# Altium PCB 01-超声波传感器模块-电路板图.PcbDoc
Units mm, origin at the board's own origin, x right, y up, seen from the top; angles counter-clockwise.
Board outline 42.63 x 19.24 mm, 4 copper layers (Top Layer, Mid-Layer 7, Mid-Layer 14, Bottom Layer); 10 components, 11 nets, 44 pads, 9 vias.
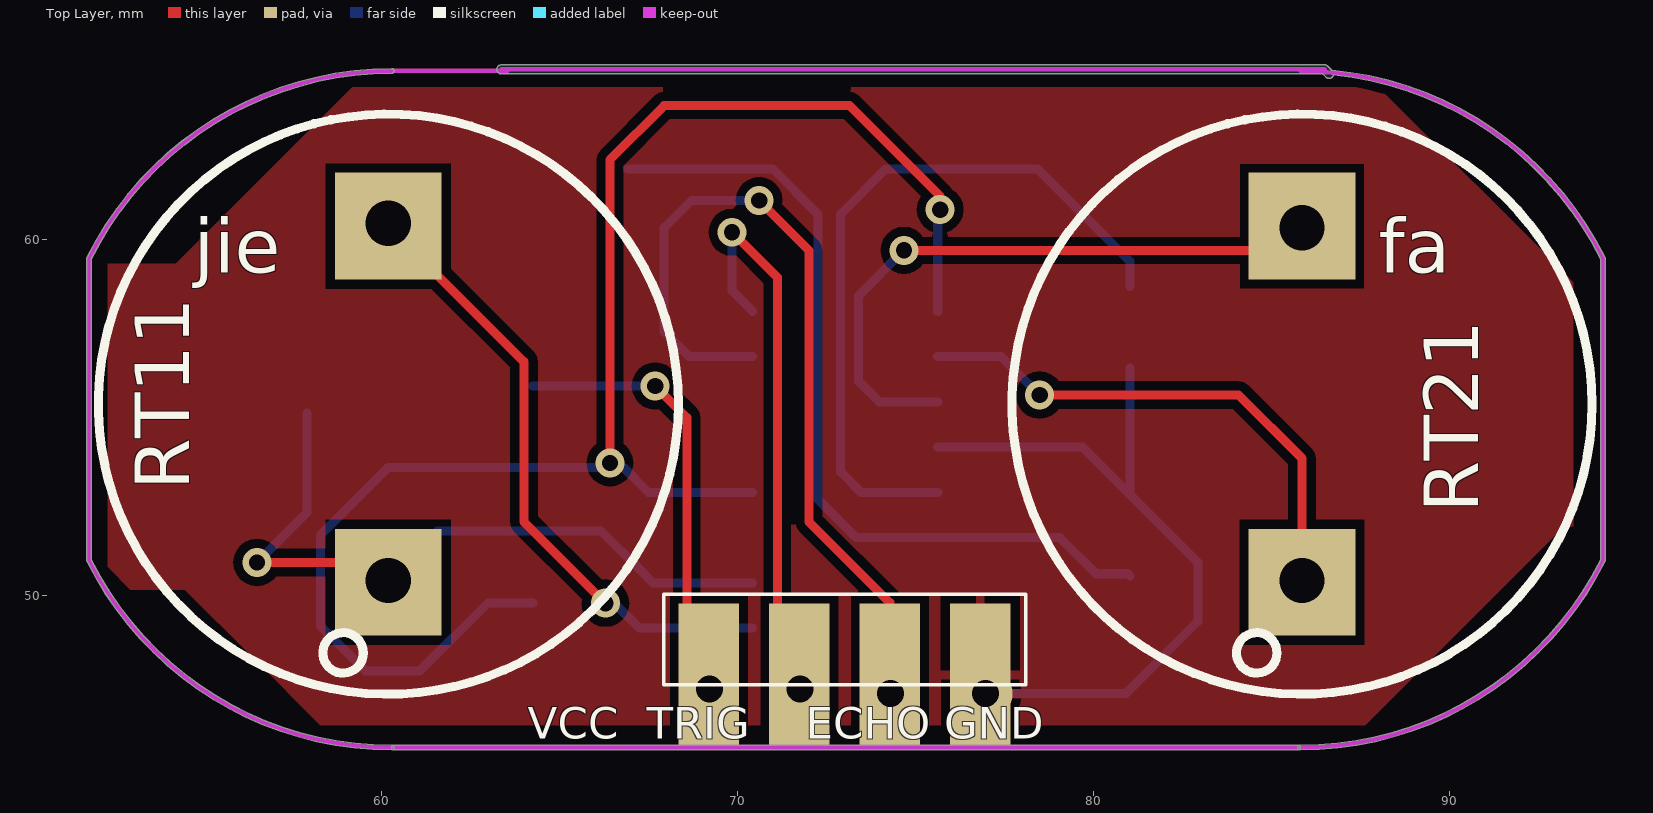
[diagram p0: Top Layer view]
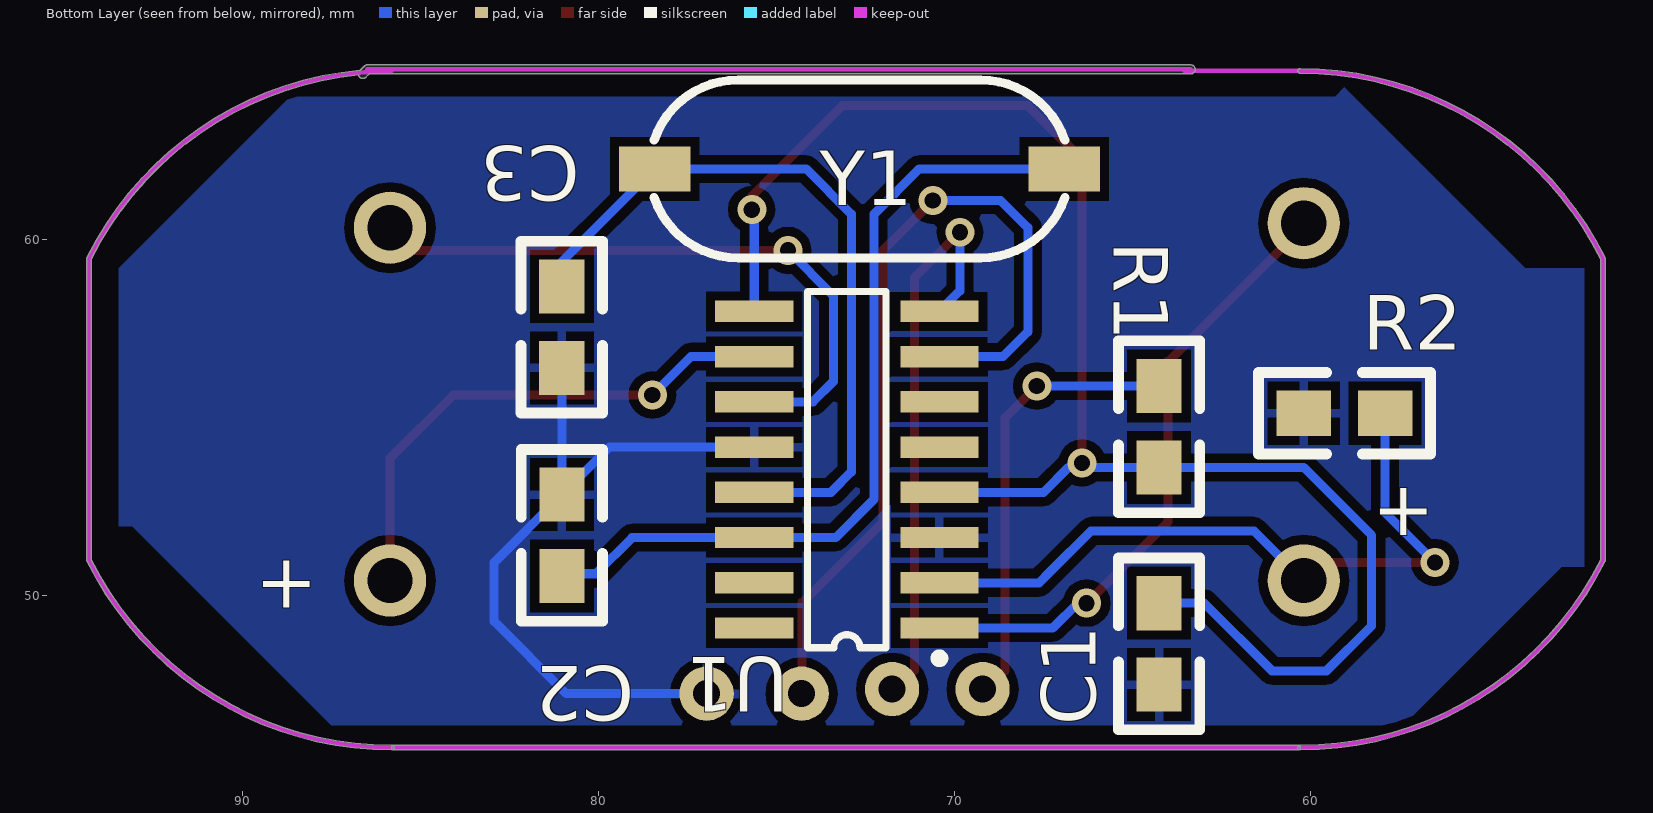
[diagram p1: Bottom Layer view, seen from below]
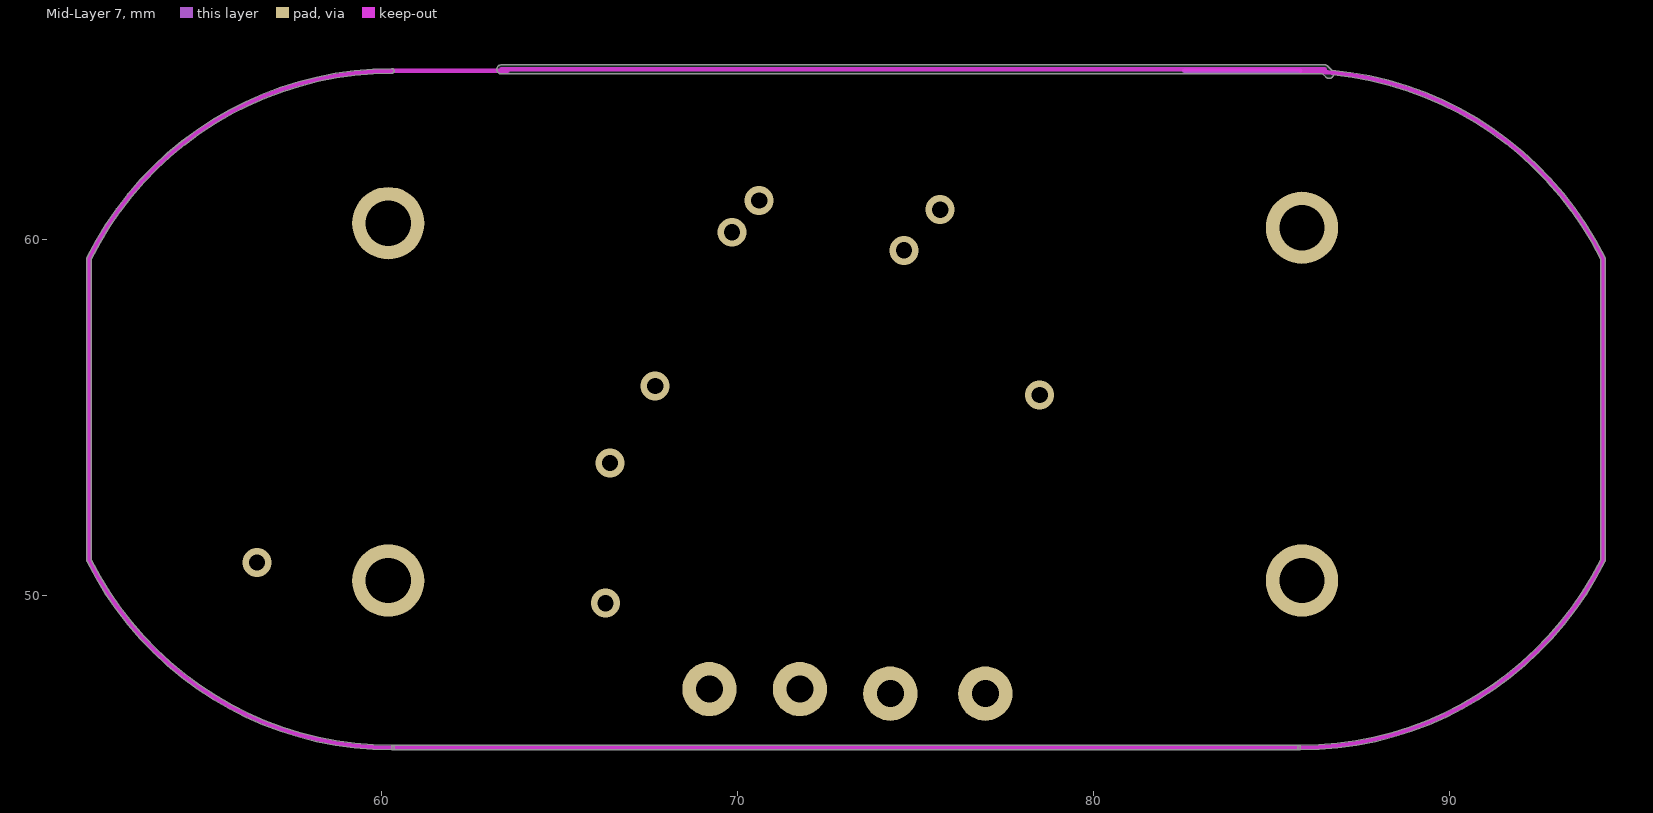
[diagram p2: Mid-Layer 7]

## Layer stack, top to bottom
Top Layer: signal copper 0.0356
Dielectric: dielectric 0.32, FR-4, Dk 4.8
Mid-Layer 7: signal copper 0.0356
Dielectric: dielectric 0.32, FR-4, Dk 4.8
Mid-Layer 14: signal copper 0.0356
Dielectric: dielectric 0.32, FR-4, Dk 4.8
Bottom Layer: signal copper 0.0356

## Board outline
51.742,50.954 cw(c51.799,50.983) 51.741,50.958 cw(c51.799,50.983) 51.735,50.985 51.735,59.467 cw(c51.799,59.468) 51.741,59.494 cw(c51.799,59.468) 51.742,59.497 cw(c60.299,55.226) 60.299,64.79 cw(c60.299,55.226) 60.299,64.79 cw(c60.299,64.726) 60.363,64.726 cw(c60.299,64.726) 60.3,64.662 cw(c60.299,64.726) 60.299,64.662 ccw(c60.299,55.226) 51.863,59.453 51.863,50.998 ccw(c60.299,55.226) 60.299,45.79 85.799,45.79 ccw(c85.799,55.226) 94.235,50.998 94.235,59.453 ccw(c85.799,55.226) 86.738,64.615 cw(c86.614,64.643) 86.524,64.553 86.437,64.64 ccw(c85.799,55.226) 86.402,64.643 63.373,64.643 cw(c63.373,64.77) 63.306,64.662 cw(c63.373,64.77) 63.247,64.79 cw(c63.373,64.77) 63.373,64.897 86.487,64.897 cw(c86.487,64.77) 86.578,64.86 86.577,64.86 86.689,64.748 cw(c85.799,55.226) 94.356,59.497 cw(c85.799,55.226) 94.357,59.497 94.356,59.497 cw(c94.299,59.468) 94.358,59.494 cw(c94.299,59.468) 94.363,59.468 cw(c94.299,59.468) 94.363,59.467 94.363,50.983 ccw(c94.299,50.983) 94.363,50.985 94.363,50.983 cw(c94.299,50.983) 94.358,50.958 cw(c94.299,50.983) 94.356,50.954 ccw(c85.799,55.226) 94.357,50.955 94.356,50.954 cw(c85.799,55.226) 85.799,45.662 cw(c85.799,45.726) 85.799,45.79 85.799,45.662 60.299,45.662 ccw(c60.299,45.726) 60.363,45.726 ccw(c60.299,45.726) 60.299,45.79 60.299,45.662 cw(c60.299,55.226)

## Design rules (kind name [scope] priority, off if disabled: settings)
Clearance [All] p1: gap=0.254
PolygonConnect [All] p1: connectstyle=Relief reliefconductorwidth=0.254 reliefentries=4 polygonreliefangle="90 Angle"
RoutingVias [All] p1: holewidth=0.711 width=1.27 viastyle="Through Hole" minholewidth=0.711 minwidth=1.27 maxholewidth=0.711 maxwidth=1.27
SilkscreenOverComponentPads [All] p1: minsilkscreentomaskgap=0.254
SolderMaskExpansion [All] p1: expansion=0.102
TestPointUsage [All] p1: valid=0 allowmultiple=FALSE
Testpoint [All] p1: side=15 testpointundercomponent=TRUE minsize=1.016 maxsize=2.54 preferedsize=1.524 minholesize=0 maxholesize=1.016 preferedholesize=0.813 testpointgrid=0.025 style=1023 order=0-112345678
Width [All] p1: maxlimit=0.254 minlimit=0.254 preferedwidth=0.254
23 further rules are at their usual default settings.

## Components (designator, comment, footprint, x,y, rotation, side; value= is the part's Value field where it differs from the comment)
C1 "Cap Semi" 0805 64.516,46.736 r90 bottom
C2 "Cap Semi" 0805 81.28,49.784 r90 bottom
C3 "Cap Semi" 0805 80.772,59.436 r270 bottom
R1 "Res2" 0805 64.516,52.832 r90 bottom
R2 "Res2" 0805 60.96,55.372 r180 bottom
RT11 "TC40K" US-16mm 60.198,55.372 r90 top
RT21 "TC40K" US-16mm 85.852,55.372 r90 top
U1 "CS100_SOP16" SSOP16 71.628,47.752 r90 bottom
"VCC  TRIG    ECHO GND" "Header 4" DIP4-22F 69.2,48.768 r0 top (schematic designator P1)
Y1 "8M" XTAL 72.644,61.976 r0 bottom

## Footprints (in the part's own frame and the unit in brackets; to place one, negate y for a bottom-side part, rotate by r counter-clockwise, add the part's x,y. Pads: shape width x height; smd on the part's side, far side on the other; paste and mask are expansions set on the pad)
0805 [mil]
  rect 60x50 smd: 1(30,-10.06) 2(120,-10.06)
  silkscreen extent -20,-55 170,35
DIP4-22F [mm]
  rect 1.7x4 smd: 1(0,-1) 2(2.54,-1) 3(5.08,-1) 4(7.62,-1)
  silkscreen extent -1.27,-1.27 8.89,1.27
SSOP16 [mm]
  rect 0.6x2.2 smd: 1(1.334,-1.203) 2(2.604,-1.203) 3(3.874,-1.203) 4(5.144,-1.203) 5(6.414,-1.203) 6(7.684,-1.203) 7(8.954,-1.203) 8(10.224,-1.203) 9(10.224,3.997) 10(8.954,3.997) 11(7.684,3.997) 12(6.414,3.997) 13(5.144,3.997) 14(3.874,3.997) 15(2.604,3.997) 16(1.334,3.997)
  silkscreen extent 0.36,-1.33 10.78,2.5
US-16mm [mm]
  rect 3x3 smd: +(-5,0) -(5,0)
  silkscreen extent -8.14,-8.14 8.14,8.14
XTAL [mm]
  rect 2x1.27 smd: 1(-5.723,0) 2(5.777,0)
  silkscreen extent -5.74,-2.5 5.79,2.5

## Part data
C1 C2 C3: "Capacitor (Semiconductor SIM Model)"
R1 R2: "Resistor"
"VCC  TRIG    ECHO GND": "Header, 4-Pin"
Y1: library part XTAL, "Crystal Oscillator"

## Free pads (board coordinates)
  round 1.524 hole 0.762: 2(69.215,47.371) 3(71.755,47.371) 4(74.295,47.244) 5(76.962,47.244)
  round 2.032 hole 1.27: +(60.198,50.419) +(85.852,50.419) +(85.852,60.325) -(60.198,60.452)

## Via types
v1: diameter 0.813, hole 0.457, Top Layer to Bottom Layer, 9 vias

## Nets (pads, with @x,y where several pads share a name; then routed paths per layer and width w, separated by ;. In a path a pad name is that pad's centre, name@x,y a point inside that pad or via, vN(x,y) a via of type N, cw(c..) or ccw(c..) an arc to the next point about the centre after c; other vN are vias at no path point)
ECHO: "VCC  TRIG    ECHO GND.3" pad.4 U1.7 | length 23.5
  Top Layer w0.254: v1(70.612,61.087) 72.009,59.69 72.009,52.07 74.28,49.799 pad.4@74.28,47.768
  Bottom Layer w0.254: U1.7 68.643,56.706 67.945,57.404 67.945,60.325 68.707,61.087 v1(70.612,61.087)
GND: "VCC  TRIG    ECHO GND.4" C1.1 C2.2 C3.2 pad.5 R2.1 U1.3 U1.12 | length 21.1
  Bottom Layer w0.254: U1.12 79.69,54.166 C2.2 ; pad.5 80.899,47.244 82.931,49.276 82.931,50.925 C2.2 ; C2.2@80.706,53.15 C2.2 ; C3.2 81.024,56.385 C2.2
NetC2_1: C2.1 U1.14 Y1.1 | length 23.5
  Bottom Layer w0.254: Y1.1 70.993,61.976 72.263,60.706 72.263,52.705 73.342,51.626 U1.14 79.057,51.626 80.073,50.61 80.96,50.61 C2.1
NetC3_1: C3.1 U1.13 Y1.2 | length 20.6
  Bottom Layer w0.254: U1.13 73.47,52.896 72.898,53.468 72.898,60.706 74.168,61.976 Y1.2 81.028,59.369 C3.1
NetP1_1: "VCC  TRIG    ECHO GND.1" pad.2 R1.2 | length 11.8
  Top Layer w0.254: v1(67.691,55.88) 68.58,54.991 68.58,47.895
  Bottom Layer w0.254: R1.2 v1(67.691,55.88)
NetR2_2: pad.+@60.198,50.419 R2.2 RT11.+ U1.2 | length 20.1
  Top Layer w0.254: v1(56.515,50.927) 59.643,50.927 RT11.+
  Bottom Layer w0.254: v1(56.515,50.927) 57.912,52.324 R2.2 ; pad.+@60.198,50.419 61.595,51.816 66.167,51.816 67.31,50.673 67.627,50.356 U1.2
NetRT11_-: pad.- RT11.- U1.1 | length 17.5
  Top Layer w0.254: RT11.- 64.008,56.562 64.008,52.07 v1(66.294,49.784)
  Bottom Layer w0.254: v1(66.294,49.784) 66.548,49.784 67.246,49.086 U1.1
S_TN: pad.+@85.852,60.325 RT21.- U1.11 | length 18.1
  Top Layer w0.254: v1(74.676,59.69) 85.17,59.69 85.829,60.348 RT21.-
  Bottom Layer w0.254: v1(74.676,59.69) 73.406,58.42 73.406,56.007 73.977,55.436 U1.11
S_TP: pad.+@85.852,50.419 RT21.+ U1.10 | length 14.9
  Top Layer w0.254: v1(78.486,55.626) 84.074,55.626 85.852,53.848 85.852,50.419 RT21.+
  Bottom Layer w0.254: U1.10 77.407,56.706 78.423,55.69 v1@78.486,55.753
TRIG: "VCC  TRIG    ECHO GND.2" pad.3 U1.8 | length 15.3
  Top Layer w0.254: v1(69.85,60.198) 71.12,58.928 71.12,47.895
  Bottom Layer w0.254: v1(69.85,60.198) 69.85,58.551 U1.8
VCC: C1.2 R1.1 U1.4 U1.9 | length 46
  Top Layer w0.254: v1@66.421,53.594 66.421,62.23 67.945,63.754 73.152,63.754 75.692,61.214 v1(75.692,60.833)
  Bottom Layer w0.254: C1.2 62.992,49.784 61.087,47.879 59.563,47.879 58.293,49.149 58.293,51.689 60.198,53.594 R1.1 66.802,53.594 67.5,52.896 U1.4 ; U1.9 75.625,60.893 v1@75.692,60.96
  other v1: 66.421,53.721
pads on no net: U1.5 U1.6 U1.15 U1.16
copper on no net: | length 3.3
  Mid-Layer 7 w0.127: 82.549,64.726 85.799,64.726

## Polygon pours and split planes (outlines as drawn)
GND on Top Layer "Top Layer-No Net" (solid): 52.324,59.309 54.229,59.309 59.182,64.262 77.597,64.262 88.011,64.262 93.218,59.055 93.472,58.801 93.472,51.943 93.218,51.943 87.757,46.482 87.63,46.355 63.627,46.355 58.293,46.355 56.388,48.26 54.483,50.165 52.959,50.165 52.324,50.8 52.324,59.309
GND on Bottom Layer "Top Layer-No Net" (solid): 52.324,59.182 53.975,59.182 59.055,64.262 59.309,64.008 88.011,64.008 88.646,64.008 93.345,59.309 93.472,59.182 93.472,51.943 93.091,51.943 87.63,46.482 87.503,46.355 58.039,46.355 57.404,46.355 53.848,49.911 52.959,50.8 52.324,50.8 52.324,59.182

## Keep-outs
Keep-Out Layer:
  lines w0.127: 51.799,59.468 cw(c60.299,55.226) 60.299,64.726 63.549,64.726 ; 51.799,59.468 51.799,50.983 ccw(c60.299,55.226) 60.299,45.726 85.799,45.726 ccw(c85.799,55.226) 94.299,50.983 94.299,59.468 ; 63.373,64.77 86.487,64.77 ; 85.799,64.726 cw(c85.799,55.226) 94.299,59.468

## Silkscreen, mask and mechanical layers (free items; w line width, h text height)
Top Overlay:
  text "jie" at 54.737,59.055 h1.52
  text "fa" at 88.011,59.055 h1.52
Bottom Overlay:
  text "+" at 56.515,51.689 h1.52
  text "+" at 87.884,49.657 h1.52